# Allegro board master.brd
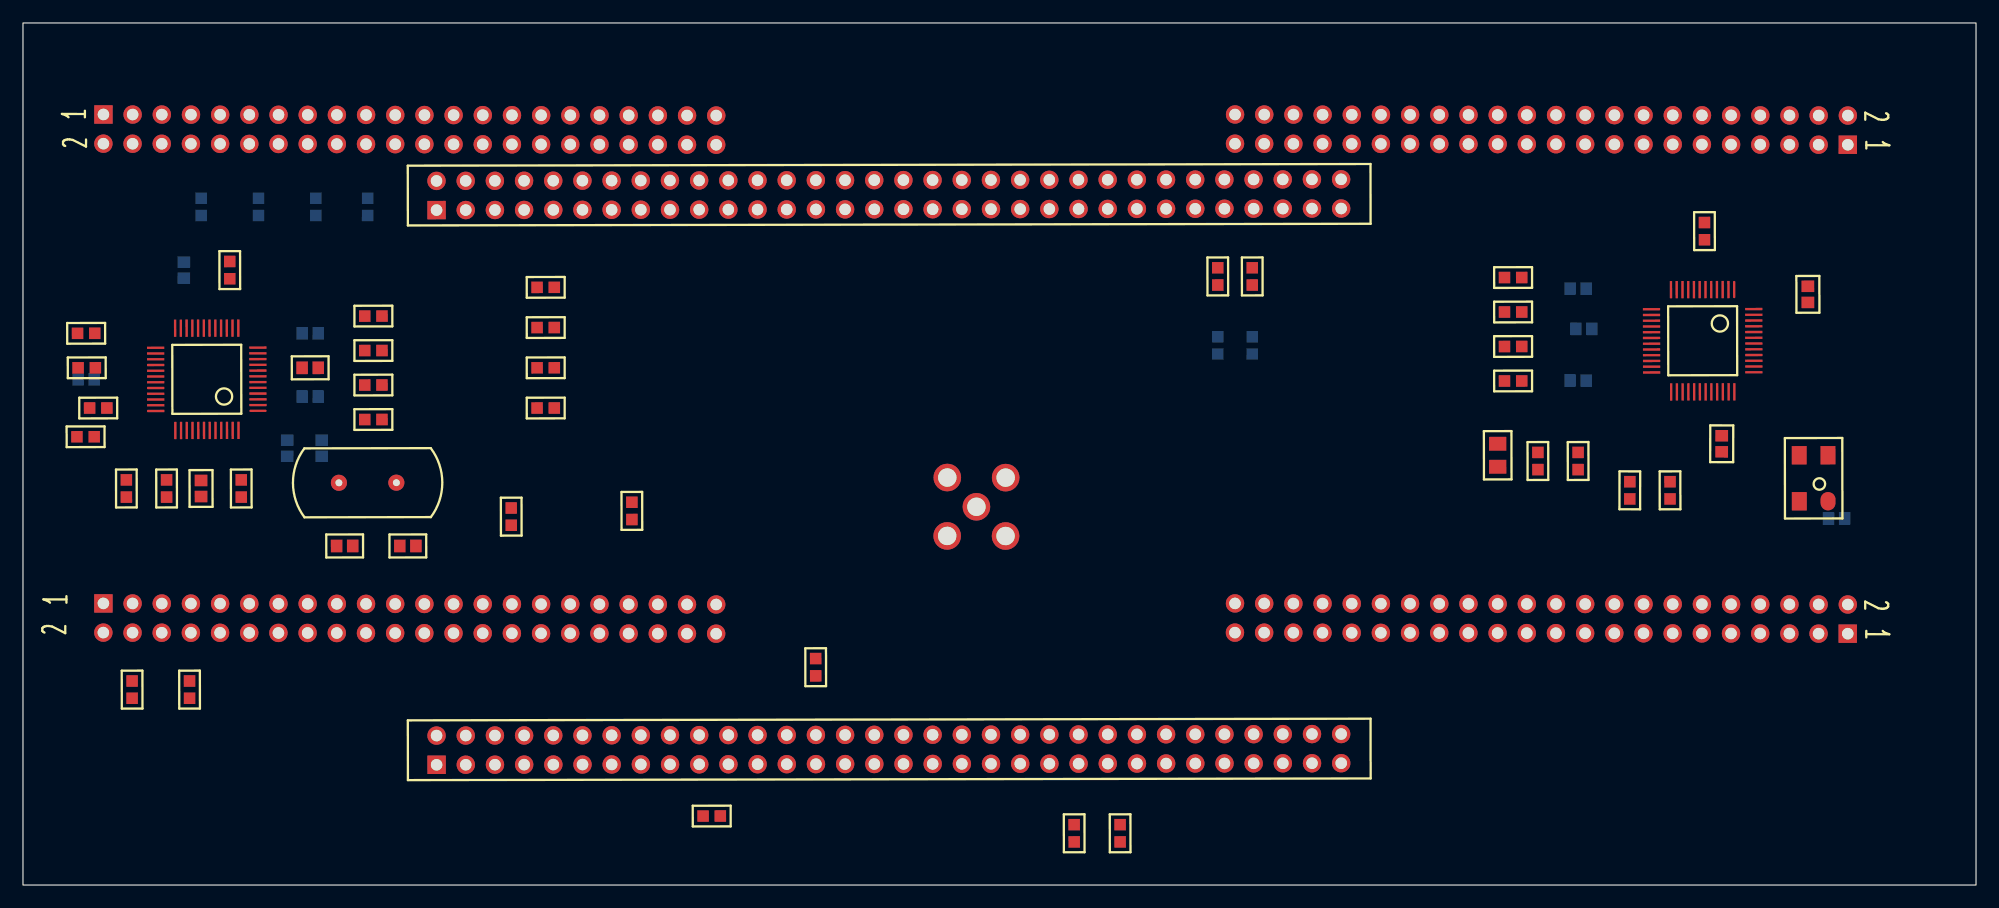
[diagram p0: board, top side]
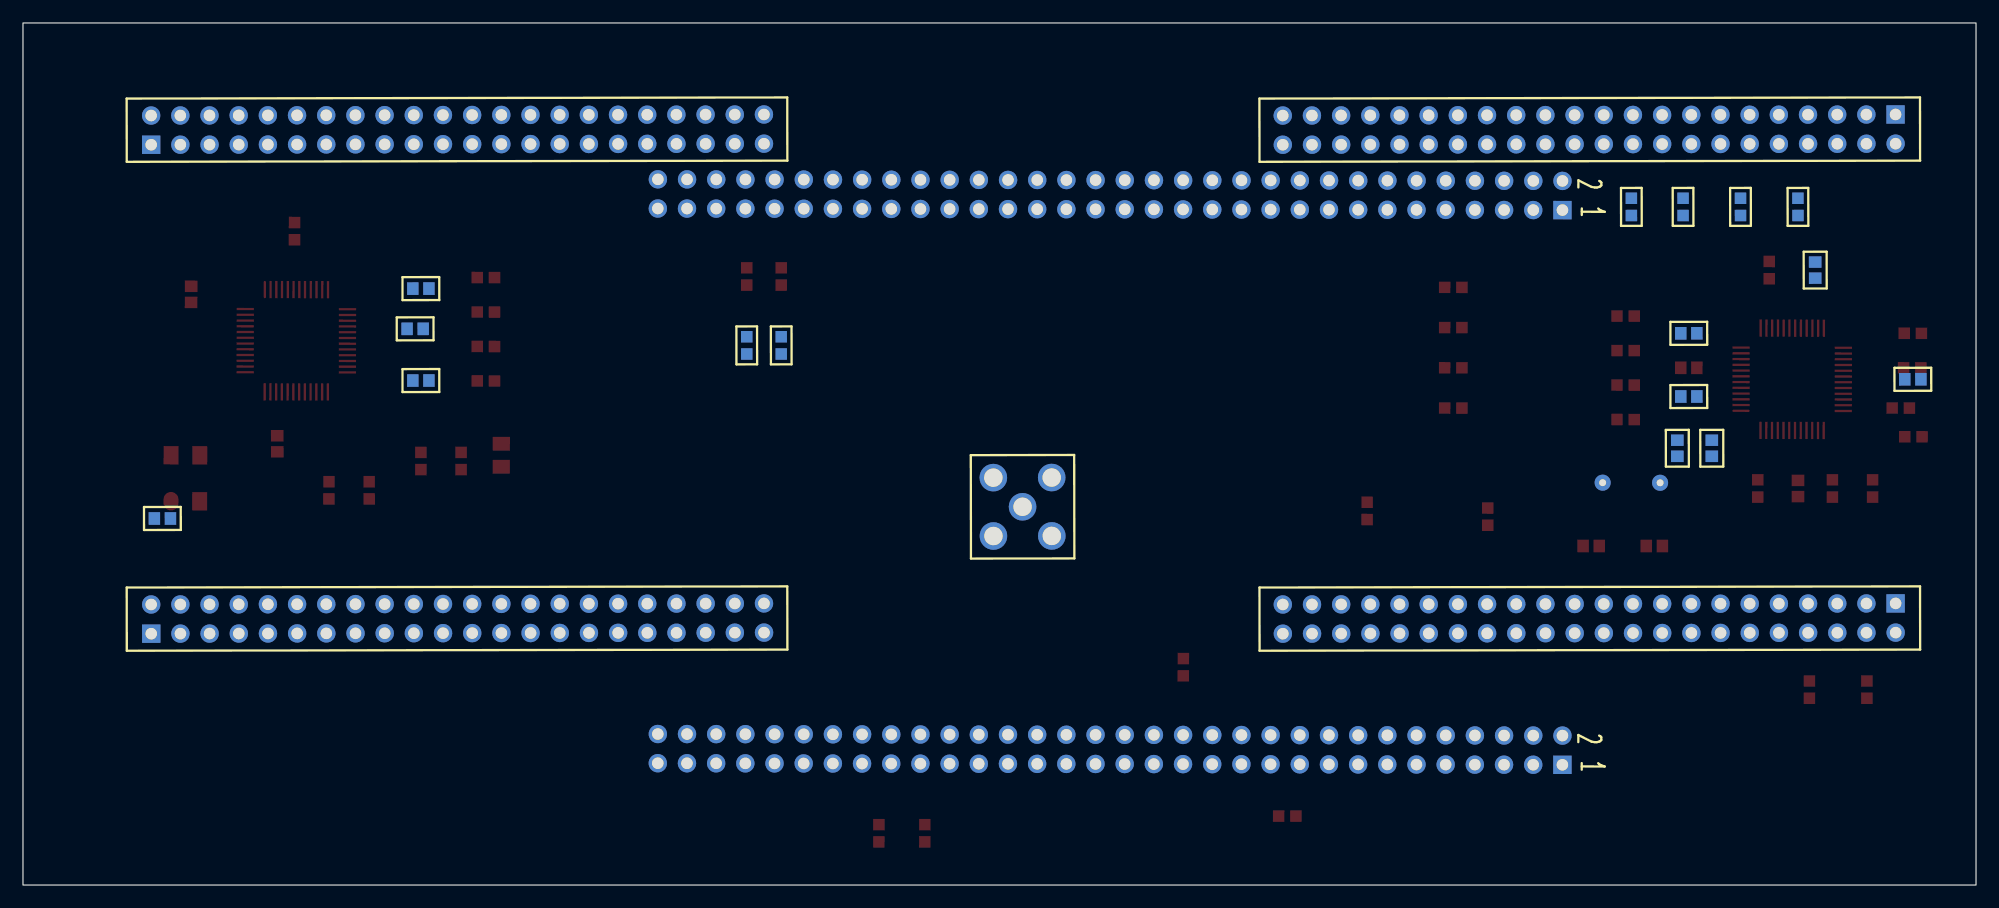
[diagram p1: board, bottom side, seen from below]

Outline 170 x 75 mm; copper layers: TOP, VSS, VDD, BOTTOM. Coordinates in mm from the lower left corner of the outline.
Outline path: rectangle 0,0 170,75

## Placement (name value [footprint] x y rotation side)
C1  0.1u  [C0603]  15.5 34.5 90.1 top
C2  0.1u  [C0603]  5.5 44 359.9 bottom
C3  0.1u  [C0603]  14 53.5 269.9 bottom
C4  0.1u  [C0603]  23 38 89.9 bottom
C5  0.1u  [C0603]  26 38 89.9 bottom
C6  0.1u  [C0603]  135.37 43.89 179.9 bottom
C8  4.7u  [C0603]  135.87 48.39 179.9 bottom
C10  0.1u  [C0603]  25 42.5 359.9 bottom
C12  0.1u  [C0603]  25 48 179.9 bottom
C13  0.1u  [C0603]  147.87 38.39 89.9 top
C14  0.1u  [C0603]  135.37 51.89 359.9 bottom
C16  22p  [C0603]  28 29.5 180.1 top
C17  0.1u  [C0603]  157.87 31.89 359.9 bottom
C18  22p  [C0603]  33.5 29.5 0.1 top
C19  0.1u  [C0603]  25 45 0.1 top
C20  4.7u  [C0603]  155.37 51.39 90.1 top
J1  -  [523-132134]  82.99 32.91 179.9 bottom
J2  CONN SOCKET 32x2  [M20-6103245]  36 59.99 90.1 top
J3  CONN SOCKET 32x2  [M20-6103245]  36 11.73 90.1 top
J4  CONN EDGE 22X2  [PLD44]  46.37 23.16 269.9 bottom
J5  CONN EDGE 22X2  [PLD44]  46.37 65.7 269.9 bottom
J6  CONN EDGE 22X2  [PLD44]  119.47 65.75 89.9 bottom
J7  CONN EDGE 22X2  [PLD44]  119.47 23.21 89.9 bottom
NOREF  -  []  0 75 0 top
NOREF#2  -  []  0 0 90 top
R1  10K  [R0603]  25.5 58.95 89.9 bottom
R2  10K  [R0603]  5.5 45 0.1 top
R3  10K  [R0603]  30 58.95 89.9 bottom
R4  10K  [R0603]  5.45 48 0.1 top
R5  10K  [R0603]  6.5 41.5 0.1 top
R6  10K  [R0603]  12.5 34.45 90.1 top
R7  10K  [R0603]  9 34.45 90.1 top
R8  2.2k  [R0603]  135.37 36.94 270.1 top
R9  2.2k  [R0603]  131.87 36.94 270.1 top
R10  4.87k 1%  [R805]  128.37 37.39 90.1 top
R11  51 1%  [R0603]  30.45 40.5 0.1 top
R12  51 1%  [R0603]  129.66 43.85 0.1 top
R13  51 1%  [R0603]  129.66 46.85 0.1 top
R14  51 1%  [R0603]  30.45 43.5 0.1 top
R15  2.2k  [R0603]  143.37 34.39 270.1 top
R16  2.2k  [R0603]  139.87 34.39 269.9 top
R17  2.2k  [R0603]  104 47 269.9 bottom
R18  2.2k  [R0603]  107 47 269.9 bottom
R19  51 1%  [R0603]  129.66 49.85 0.1 top
R20  51 1%  [R0603]  129.66 52.85 0.1 top
R21  10K  [R0603]  20.5 58.95 89.9 bottom
R22  51 1%  [R0603]  30.45 46.5 0.1 top
R23  51 1%  [R0603]  30.45 49.5 0.1 top
R24  150  [R0603]  104 53 270.1 top
R25  150  [R0603]  91.5 4.55 270.1 top
R26  150  [R0603]  95.5 4.45 90.1 top
R27  150  [R0603]  107 53 270.1 top
R28  2.2k  [R0603]  146.37 56.84 90.1 top
R29  10K  [R0603]  9.5 16.95 90.1 top
R30  10K  [R0603]  45.45 45 0.1 top
R31  10K  [R0603]  45.45 48.5 0.1 top
R32  10K  [R0603]  45.45 52 0.1 top
R33  10K  [R0603]  18 53.45 90.1 top
R34  6.8k 1%  [R0603]  19 34.55 270.1 top
R35  10K  [R0603]  5.5 39 180.1 top
R36  10K  [R0603]  42.5 32 90.1 top
R37  10K  [R0603]  15.5 59.05 269.9 bottom
R38  10K  [R0603]  45.55 41.5 180.1 top
R39  10K  [R0603]  14.5 17.05 270.1 top
R40  10K  [R0603]  69 19 270.1 top
R41  10K  [R0603]  53 32.5 90.1 top
R42  10K  [R0603]  60 6 180.1 top
U1  DM9161AEP  [LQFP48]  16 44 180.1 top
U2  DP83640  [LQFP48]  146.21 47.35 270.1 top
X1  FOX924B-25.000  [FOX924]  155.87 35.39 90.1 top
Y1  KX-3HT 25.0 MHz  [HC-49_U3H]  30 35 0.1 top

## Library data of the parts
C1-C6 C8 C10 C12-C14 C16-C20 = CAP NP
J1 = CON5
J2 J3 = CONN SOCKET 32x2
J4-J7 = CONN EDGE 22X2
R1-R42 = RESISTOR
U1 = DM9161AEP
U2 = DP83640_2
X1 = FOX924B-25.000
Y1 = CRYSTAL13_0

## Footprints (pads in the part's own frame, mm; a bottom-side part is the same pattern mirrored in y, then rotated)
523-132134
  round 2.4 hole 1.6: 1(-2.54,2.54) 2(2.54,2.54) 3(-2.54,-2.54) 4(2.54,-2.54) 5(0,0)
C0603
  rect 1x1.1 smd: 1(-0.7,0) 2(0.7,0)
FOX924
  oval 1.6x1.3 smd: 1(-2,-1.25)
  rect 1.6x1.3 smd: 2(2,-1.25) 3(2,1.25) 4(-2,1.25)
HC-49_U3H
  round 1.4 hole 0.6: 1(-2.5,0) 2(2.5,0)
LQFP48
  oval 1.5x0.2 smd: 1(-4.45,2.75)
  rect 1.5x0.2 smd: 2(-4.45,2.25) 3(-4.45,1.75) 4(-4.45,1.25) 5(-4.45,0.75) 6(-4.45,0.25) 7(-4.45,-0.25) 8(-4.45,-0.75) 9(-4.45,-1.25) 10(-4.45,-1.75) 11(-4.45,-2.25) 12(-4.45,-2.75) 25(4.45,-2.75) 26(4.45,-2.25) 27(4.45,-1.75) 28(4.45,-1.25) 29(4.45,-0.75) 30(4.45,-0.25) 31(4.45,0.25) 32(4.45,0.75) 33(4.45,1.25) 34(4.45,1.75) 35(4.45,2.25) 36(4.45,2.75)
  rect 0.2x1.5 smd: 13(-2.75,-4.45) 14(-2.25,-4.45) 15(-1.75,-4.45) 16(-1.25,-4.45) 17(-0.75,-4.45) 18(-0.25,-4.45) 19(0.25,-4.45) 20(0.75,-4.45) 21(1.25,-4.45) 22(1.75,-4.45) 23(2.25,-4.45) 24(2.75,-4.45) 37(2.75,4.45) 38(2.25,4.45) 39(1.75,4.45) 40(1.25,4.45) 41(0.75,4.45) 42(0.25,4.45) 43(-0.25,4.45) 44(-0.75,4.45) 45(-1.25,4.45) 46(-1.75,4.45) 47(-2.25,4.45) 48(-2.75,4.45)
M20-6103245
  rect 1.6x1.6 hole 1: 1(-1.27,0)
  round 1.6 hole 1: 2(1.27,0) 3(-1.27,-2.54) 4(1.27,-2.54) 5(-1.27,-5.08) 6(1.27,-5.08) 7(-1.27,-7.62) 8(1.27,-7.62) 9(-1.27,-10.16) 10(1.27,-10.16) 11(-1.27,-12.7) 12(1.27,-12.7) 13(-1.27,-15.24) 14(1.27,-15.24) 15(-1.27,-17.78) 16(1.27,-17.78) 17(-1.27,-20.32) 18(1.27,-20.32) 19(-1.27,-22.86) 20(1.27,-22.86) 21(-1.27,-25.4) 22(1.27,-25.4) 23(-1.27,-27.94) 24(1.27,-27.94) 25(-1.27,-30.48) 26(1.27,-30.48) 27(-1.27,-33.02) 28(1.27,-33.02) 29(-1.27,-35.56) 30(1.27,-35.56) 31(-1.27,-38.1) 32(1.27,-38.1) 33(-1.27,-40.64) 34(1.27,-40.64) 35(-1.27,-43.18) 36(1.27,-43.18) 37(-1.27,-45.72) 38(1.27,-45.72) 39(-1.27,-48.26) 40(1.27,-48.26) 41(-1.27,-50.8) 42(1.27,-50.8) 43(-1.27,-53.34) 44(1.27,-53.34) 45(-1.27,-55.88) 46(1.27,-55.88) 47(-1.27,-58.42) 48(1.27,-58.42) 49(-1.27,-60.96) 50(1.27,-60.96) 51(-1.27,-63.5) 52(1.27,-63.5) 53(-1.27,-66.04) 54(1.27,-66.04) 55(-1.27,-68.58) 56(1.27,-68.58) 57(-1.27,-71.12) 58(1.27,-71.12) 59(-1.27,-73.66) 60(1.27,-73.66) 61(-1.27,-76.2) 62(1.27,-76.2) 63(-1.27,-78.74) 64(1.27,-78.74)
PLD44
  rect 1.6x1.6 hole 1: 1(-1.27,39.37)
  round 1.6 hole 1: 2(1.27,39.37) 3(-1.27,36.83) 4(1.27,36.83) 5(-1.27,34.29) 6(1.27,34.29) 7(-1.27,31.75) 8(1.27,31.75) 9(-1.27,29.21) 10(1.27,29.21) 11(-1.27,26.67) 12(1.27,26.67) 13(-1.27,24.13) 14(1.27,24.13) 15(-1.27,21.59) 16(1.27,21.59) 17(-1.27,19.05) 18(1.27,19.05) 19(-1.27,16.51) 20(1.27,16.51) 21(-1.27,13.97) 22(1.27,13.97) 23(-1.27,11.43) 24(1.27,11.43) 25(-1.27,8.89) 26(1.27,8.89) 27(-1.27,6.35) 28(1.27,6.35) 29(-1.27,3.81) 30(1.27,3.81) 31(-1.27,1.27) 32(1.27,1.27) 33(-1.27,-1.27) 34(1.27,-1.27) 35(-1.27,-3.81) 36(1.27,-3.81) 37(-1.27,-6.35) 38(1.27,-6.35) 39(-1.27,-8.89) 40(1.27,-8.89) 41(-1.27,-11.43) 42(1.27,-11.43) 43(-1.27,-13.97) 44(1.27,-13.97)
R0603
  rect 1x1 smd: 1(-0.7,0) 2(0.8,0)
R805
  rect 1.2x1.5 smd: 1(-1,0) 2(1,0)

## Nets
3.3V: C1.2 C2.2 C3.2 C4.2 C5.2 C12.1 C19.1 J3.51 J4.1 J4.44 J5.44 R1.1 R5.1 R22.1 R23.1 R30.2 R31.2 R32.2 R39.2 R41.2 R42.1 U1.1(AVDDR1) U1.2(AVDDR2) U1.9(AVDDT) U1.23(DVDD#23) U1.30(DVDD#30) U1.31(LEDMODE) U1.41(DVDD#41)
3.3V_M: C6.2 C8.1 C13.2 C14.1 C17.1 C20.1 J2.53 J6.1 J6.44 J7.44 R9.2 R12.2 R13.2 R15.2 R16.2 R17.2 R18.2 R19.2 R20.2 R28.2 U2.19(ANA33VDD) U2.32(IO_VDD#32) U2.48(IO_VDD#48) X1.4(VCC)
5V: J2.61 J2.63 J3.5 J3.6 J5.1 J7.1
0: C1.1 C2.1 C3.1 C4.1 C5.1 C6.1 C8.2 C10.1 C12.2 C13.1 C14.2 C16.2 C17.2 C18.2 C19.2 C20.2 J1.1 J1.2 J1.3 J1.4 J2.1 J2.2 J2.47 J2.48 J2.50 J2.51 J2.56 J2.58 J2.59 J2.64 J3.1 J3.2 J3.34 J3.43 J3.44 J3.45 J3.46 J3.52 J3.53 J3.54 J3.59 J3.60 J3.61 J3.62 J4.2 J4.12 J4.34 J4.43 J5.2 J5.11 J5.33 J5.43 J6.2 J6.12 J6.34 J6.43 J7.2 J7.11 J7.33 J7.43 R2.1 R3.1 R4.1 R6.1 R7.1 R8.2 R10.1 R21.1 R29.1 R33.2 R35.2 R36.2 R37.2 R38.1 R40.1 U1.5(AGND1) U1.6(AGND2) U1.15(DGND#15) U1.33(DGND#33) U1.39(DISMDIX) U1.44(DGND#44) U1.46(AGND) U2.15(CD_VSS) U2.18(ANAVSS) U2.35(IO_CORE_VSS) U2.47(IO_VSS) X1.2(GND)
ADC_IN: J3.63 J7.3
E_COL: J5.13 R35.1 U1.36(COL/RMII)
E_CRS: J5.10 R37.1 U1.35(CRS/PHYAD[4])
E_L_ACT: R25.2 R32.1 U1.13(LED2/OP2)
E_L_SPD: R26.1 R31.1 U1.12(LED1/OP1)
E_MDC: J5.6 U1.24(MDC)
E_MDINTR: J4.29 R36.1 U1.32(MDINTR#)
E_MDIO: J5.12 U1.25(MDIO)
E_PWR: J4.14 R38.2 U1.10(PWRDWN)
E_RES: J4.8 R39.1 U1.40(RESET#)
E_RX_ER: J5.36 R6.2 U1.38(RXER/RXD[4]/RPTR)
E_RXCLK: J5.9 R5.2 U1.34(RXCLK/10BTSER)
E_RXD0: J5.20 R1.2 U1.29(RXD[0]/PHYAD[0])
E_RXD1: J5.19 R2.2 U1.28(RXD[1]/PHYAD[1])
E_RXD2: J5.22 R3.2 U1.27(RXD[2]/PHYAD[2])
E_RXD3: J5.21 R4.2 U1.26(RXD[3]/PHYAD[3])
E_RXDV: J5.17 R7.2 U1.37(RXDV/TESTMODE)
E_TXCLK: J5.14 R21.2 U1.22(TXCLK/ISOLATE)
E_TXD0: J4.17 U1.20(TXD[0])
E_TXD1: J4.16 U1.19(TXD[1])
E_TXD2: J5.4 U1.18(TXD[2])
E_TXD3: J4.13 U1.17(TXD[3])
E_TXEN: J5.34 U1.21(TXEN)
E_TXER: J4.4 R29.2 U1.16(TXER/TXD[4])
EN_AMP: J2.26 U2.36(GPIO8)
EN_PWM: J2.8 J6.38
GPIO1: J4.20 J6.20
GPIO2: J4.19 J6.19
GPIO3: J4.18 J6.18
I2C3_SCL: J3.19 J4.36 J6.36 R42.2
I2C3_SDA: J3.20 J4.37 J6.37 R41.1
L_ACT: R18.1 R27.2 U2.26(LED_ACT)
L_SPD: R17.1 R24.2 U2.27(LED_SPEED)
LGPIO1: J2.13 J4.9
LGPIO2: J2.15 J4.10
P_COL: J7.13 U2.42(COL)
P_CRS: J7.10 U2.40(CRS/CRS_DV)
P_MDC: J7.6 U2.31(MDC)
P_MDIO: J7.12 U2.30(MDIO)
P_PWR: J6.14 R28.1 U2.7(PWRDOWN/INTN)
P_RES: J6.8 R15.1 U2.29(RESET_N)
P_RX_ER: J7.36 U2.41(RX_ER)
P_RXCLK: J7.9 U2.38(RX_CLK)
P_RXD0: J7.20 U2.46(RXD_0)
P_RXD1: J7.19 U2.45(RXD_1)
P_RXD2: J7.22 U2.44(RXD_2)
P_RXD3: J7.21 U2.43(RXD_3)
P_RXDV: J7.17 U2.39(RX_DV)
P_TRG1: J6.32 R8.1 U2.22(GPIO2)
P_TRG2: J6.23 U2.23(GPIO3)
P_TRG3: J6.31 U2.25(GPIO4)
P_TXCLK: J7.14 U2.1(TX_CLK)
P_TXD0: J6.17 U2.3(TXD_0)
P_TXD1: J6.16 U2.4(TXD_1)
P_TXD2: J7.4 U2.5(TXD_2)
P_TXD3: J6.13 U2.6(TXD_3)
P_TXEN: J7.34 U2.2(TX_EN)
PH1_C_L: J3.49 R26.2
PH1_C_R: J2.55 R24.1
PH2_C_L: J3.47 R25.1
PH2_C_R: J2.57 R27.1
PWM_NO: J2.9 J7.37
PWM_O: J2.7 J6.35
RGPIO1: J2.16 J6.9
RGPIO2: J2.14 J6.10
RX+_L: J3.56 R11.2 U1.3(RX+)
RX+_R: J2.60 R19.1 U2.14(RD+)
RX-_L: J3.58 R14.2 U1.4(RX-)
RX-_R: J2.62 R20.1 U2.13(RD-)
SH_HYD: J2.18 U2.37(GPIO9)
SPI1_MISO: J3.29 J5.18
SPI1_MOSI: J3.30 J4.15
SPI1_NSS/D1OUT: J3.28 J5.16 J7.16 R40.2
SPI1_SCK/TRIG0: J3.31 J5.15 J7.15 R9.1 U2.21(GPIO1)
SPI1_VNSS: J3.42 J5.40
SPI3_MISO: J3.21 J4.27 J6.27
SPI3_MOSI: J3.18 J4.26 J6.26
SPI3_SCK: J3.22 J4.28 J6.28
SPI3_VNSS: J3.17 J6.29
TX+_L: J3.48 R22.2 U1.7(TX+)
TX+_R: J2.52 R12.1 U2.17(TD+)
TX-_L: J3.50 R23.2 U1.8(TX-)
TX-_R: J2.54 R13.1 U2.16(TD-)
N03503: J1.5 U2.24(CLK_OUT)
N08070: U2.34(X1) X1.3(OUT)
N1858106: R16.1 U2.28(LED_LINK)
N1878190: R10.2 U2.20(VREF)
N1965725: R34.1 U1.48(BGRES)
N1965729: R34.2 U1.47(BGRESG)
N1984606: C10.2 R11.1 R14.1
N1991427: R30.1 U1.11(LED0/OP0)
N1992402: R33.1 U1.14(CABLESTS/LINKSTS)
N1994048: C16.1 U1.42(XT2) Y1.1
N1994052: C18.1 U1.43(XT1) Y1.2

Pads without a net: J2 3 4 5 6 10 11 12 17 19 20 21 22 23 24 25 27 28 29 30 31 32 33 34 35 36 37 38 39 40 41 42 43 44 45 46 49; J3 3 4 7 8 9 10 11 12 13 14 15 16 23 24 25 26 27 32 33 35 36 37 38 39 40 41 55 57 64; J4 3 5 6 7 11 21 22 23 24 25 30 31 32 33 35 38 39 40 41 42; J5 3 5 7 8 23 24 25 26 27 28 29 30 31 32 35 37 38 39 41 42; J6 3 4 5 6 7 11 15 21 22 24 25 30 33 39 40 41 42; J7 5 7 8 18 23 24 25 26 27 28 29 30 31 32 35 38 39 40 41 42; U1 45; U2 8 9 10 11 12 33; X1 1

## Copper pours and planes (outline as drawn; the poured copper is in the pictures)
3.3V on VDD: 3,4.5 34,4.5 34,15.5 45,15.5 45,4.5 103,4.5 103,21.5 90.5,21.5 90.5,69.5 11,69.5 11,62.5 3,62.5
3.3V_M on VDD: 90.5,69.5 90.5,21.5 103,21.5 103,4.5 164,4.5 164,19 155,19 155,27.5 164,27.5 164,69.5 119.5,69.5 119.5,55.5 111,55.5 110.75,55.75 110.75,63 112.25,63 112.25,69.5
5V on VDD: 0.5,0.5 0.5,74.5 169.5,74.5 169.5,0.5 ; 1 cut-out
0 on VSS: 0.5,0.5 169.5,0.5 169.5,74.5 0.5,74.5
